# EAGLE board schem (EAGLE 9.6.2)
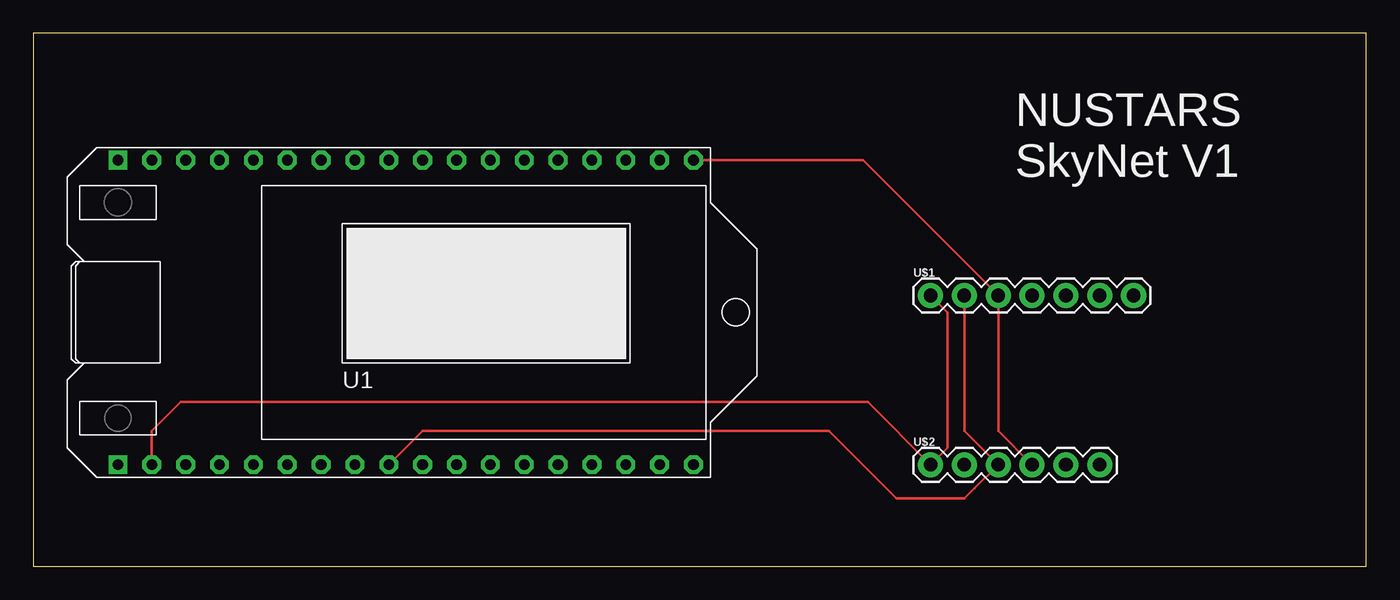
[diagram p0: board, top side]
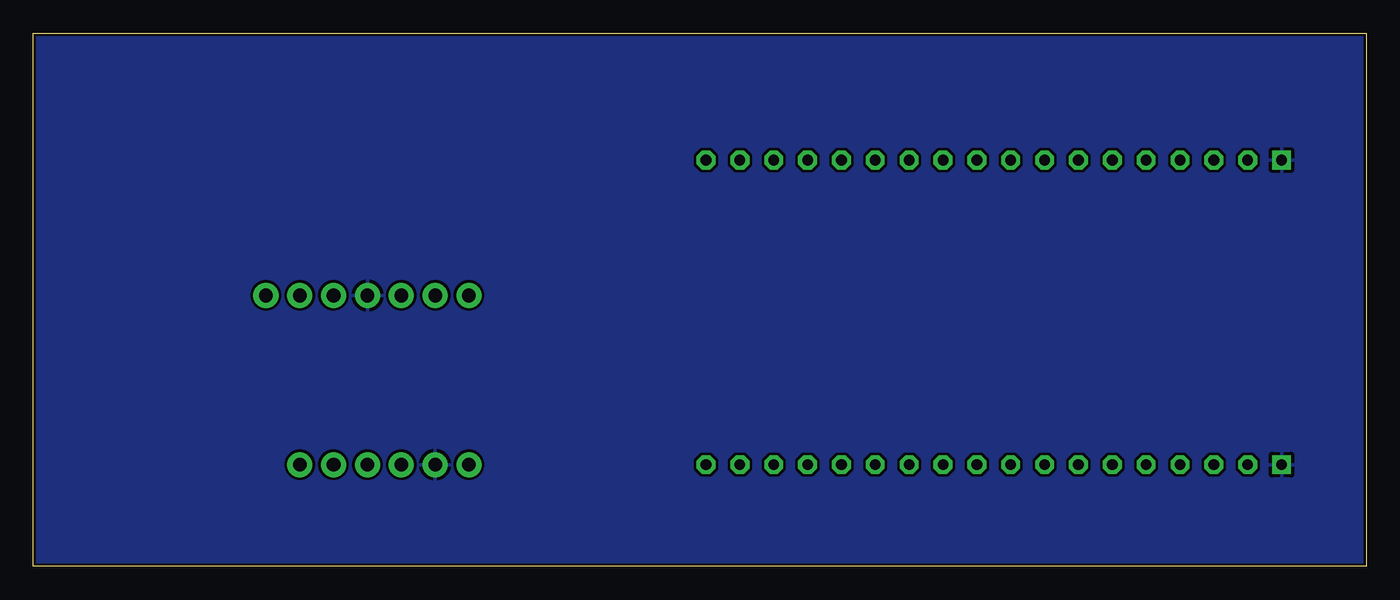
[diagram p1: board, bottom side, seen from below]

Size 100 x 40 mm. Coordinates in mm from the lower left corner, seen from the top.
Outline: 0,0 100,0 100,40 0,40 0,0
Copper layers (1*16): Top 0.035mm / dielectric 1.5mm / Bottom 0.035mm
Design rules "sparkfun": minimum track width 8mil, minimum drill 20mil, track to track 8mil, track to pad 8mil, pad to pad 8mil, via to via 8mil, smd to smd 8mil, copper to edge 8mil, drill to drill 8mil, minimum pad ring 12mil, minimum via ring 10mil, stop-mask expansion 4mil, vias tented up to drill 20mil, thermal gap 10mil

## Footprints (pad centres in the part's own frame; a part is rotated, then mirrored left to right if it is on the bottom)
2.54MM_2X18 = drill 0.8 square: P$1 -20.32,-11.43; P$36 -20.32,11.43 | drill 0.8 octagon: P$2 -17.78,-11.43; P$3 -15.24,-11.43; P$4 -12.7,-11.43; P$5 -10.16,-11.43; P$6 -7.62,-11.43; P$7 -5.08,-11.43; P$8 -2.54,-11.43; P$9 0,-11.43; P$10 2.54,-11.43; P$11 5.08,-11.43; P$12 7.62,-11.43; P$13 10.16,-11.43; P$14 12.7,-11.43; P$15 15.24,-11.43; P$16 17.78,-11.43; P$17 20.32,-11.43; P$18 22.86,-11.43; P$19 22.86,11.43; P$20 20.32,11.43; P$21 17.78,11.43; P$22 15.24,11.43; P$23 12.7,11.43; P$24 10.16,11.43; P$25 7.62,11.43; P$26 5.08,11.43; P$27 2.54,11.43; P$28 0,11.43; P$29 -2.54,11.43; P$30 -5.08,11.43; P$31 -7.62,11.43; P$32 -10.16,11.43; P$33 -12.7,11.43; P$34 -15.24,11.43; P$35 -17.78,11.43
1X07 = drill 1.016 pad 1.88: 1 0,0; 2 2.54,0; 3 5.08,0; 4 7.62,0; 5 10.16,0; 6 12.7,0; 7 15.24,0
1X06 = drill 1.016 pad 1.88: 1 0,0; 2 2.54,0; 3 5.08,0; 4 7.62,0; 5 10.16,0; 6 12.7,0

## Placement (x,y rotation side)
U1  WIFI-LORA-32-V2  [2.54MM_2X18]  26.67,19.05 0 top
U$1  BERRYIMU  [1X07]  67.31,20.32 0 top
U$2  VL53L0X  [1X06]  67.31,7.62 0 top

## Library data of the parts
U1 U$1 U$2 = telemetry_module

## Nets
+5V: U1.P$2 U$1.1 U$2.1
GND: U1.P$1 U1.P$36 U$1.4 U$2.2
SCL: U1.P$9 U$1.2 U$2.3
SDA: U1.P$19 U$1.3 U$2.4

## Tracks (layer width: path | path; a pad name or v marks a point on that pad's centre or on a via)
+5V
  Top 0.203: U1.P$2 8.89,10.14 11.06,12.31 62.62,12.31 U$2.1 68.58,8.89 68.58,19.05 U$1.1
GND
  pour Bottom (isolate 0.05): 0,0 0,39.88 0.13,40.01 99.95,40.01 100.08,39.88 100.08,-0.13 0.13,-0.13
SCL
  Top 0.203: U$1.2 69.85,10.16 U$2.3 70.61,5.84 69.85,5.08 64.77,5.08 59.69,10.16 29.21,10.16 U1.P$9
SDA
  Top 0.203: U$2.4 72.39,10.16 U$1.3 62.23,30.48 U1.P$19

## Text on the board
tPlace: NUSTARS / SkyNet V1